# EAGLE board OpenDeck (EAGLE 6.5.0)
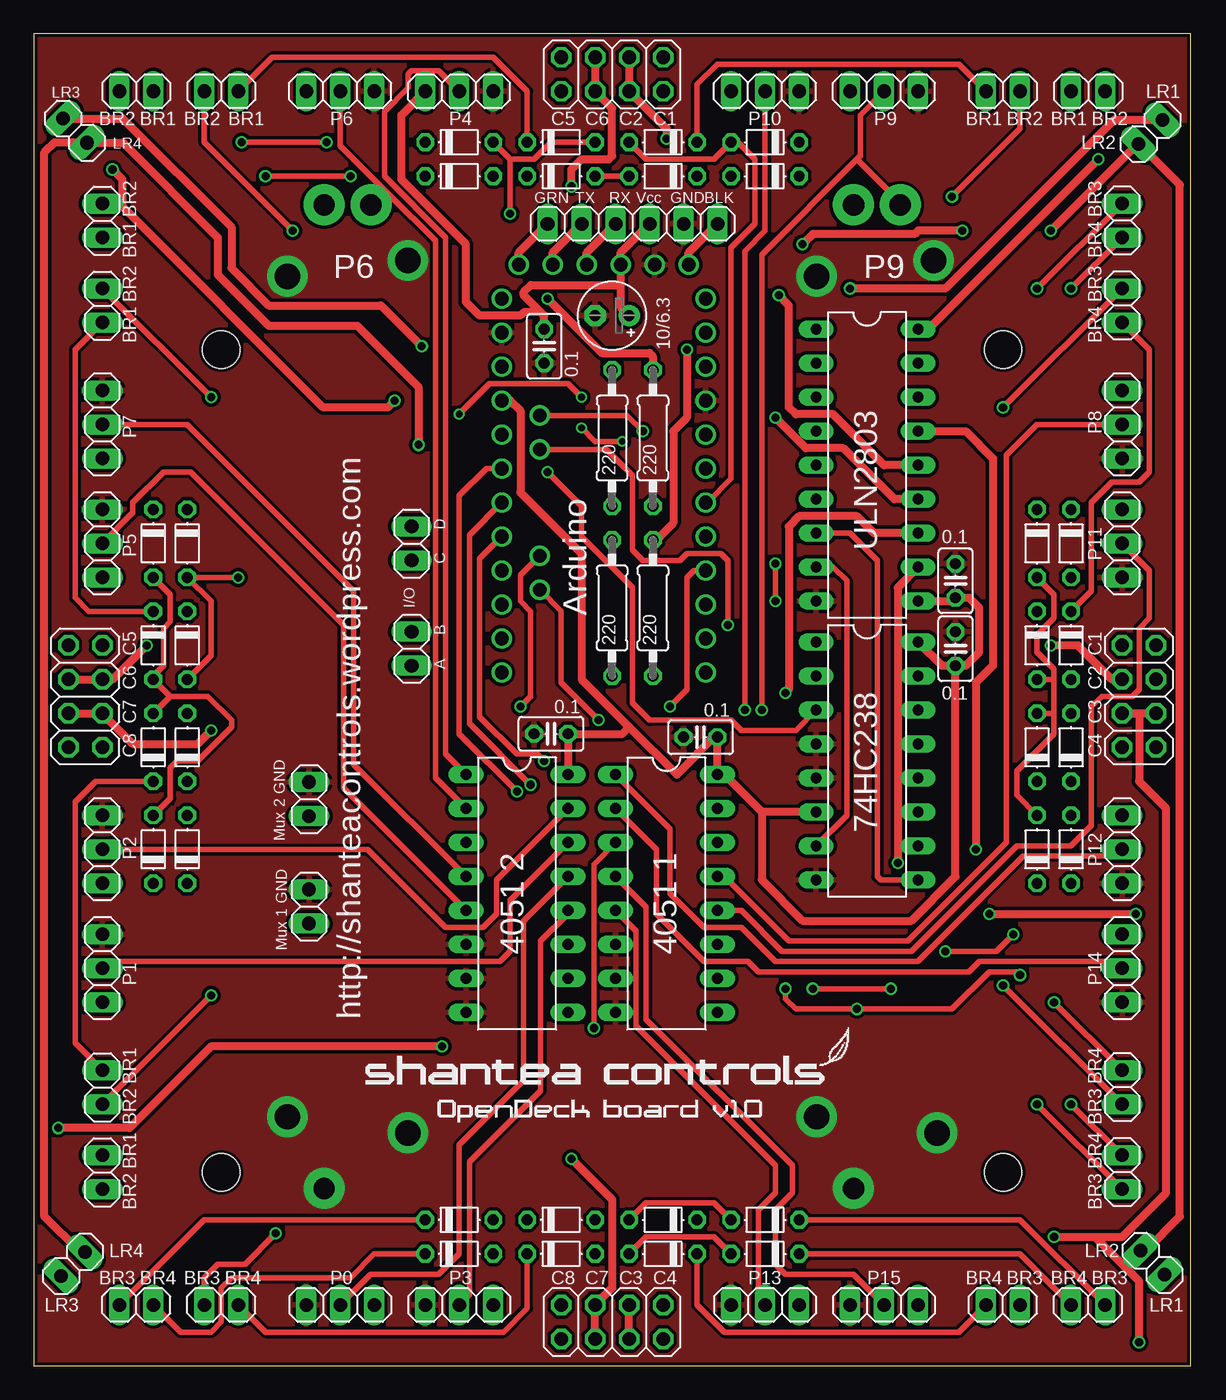
[diagram p0: board, top side]
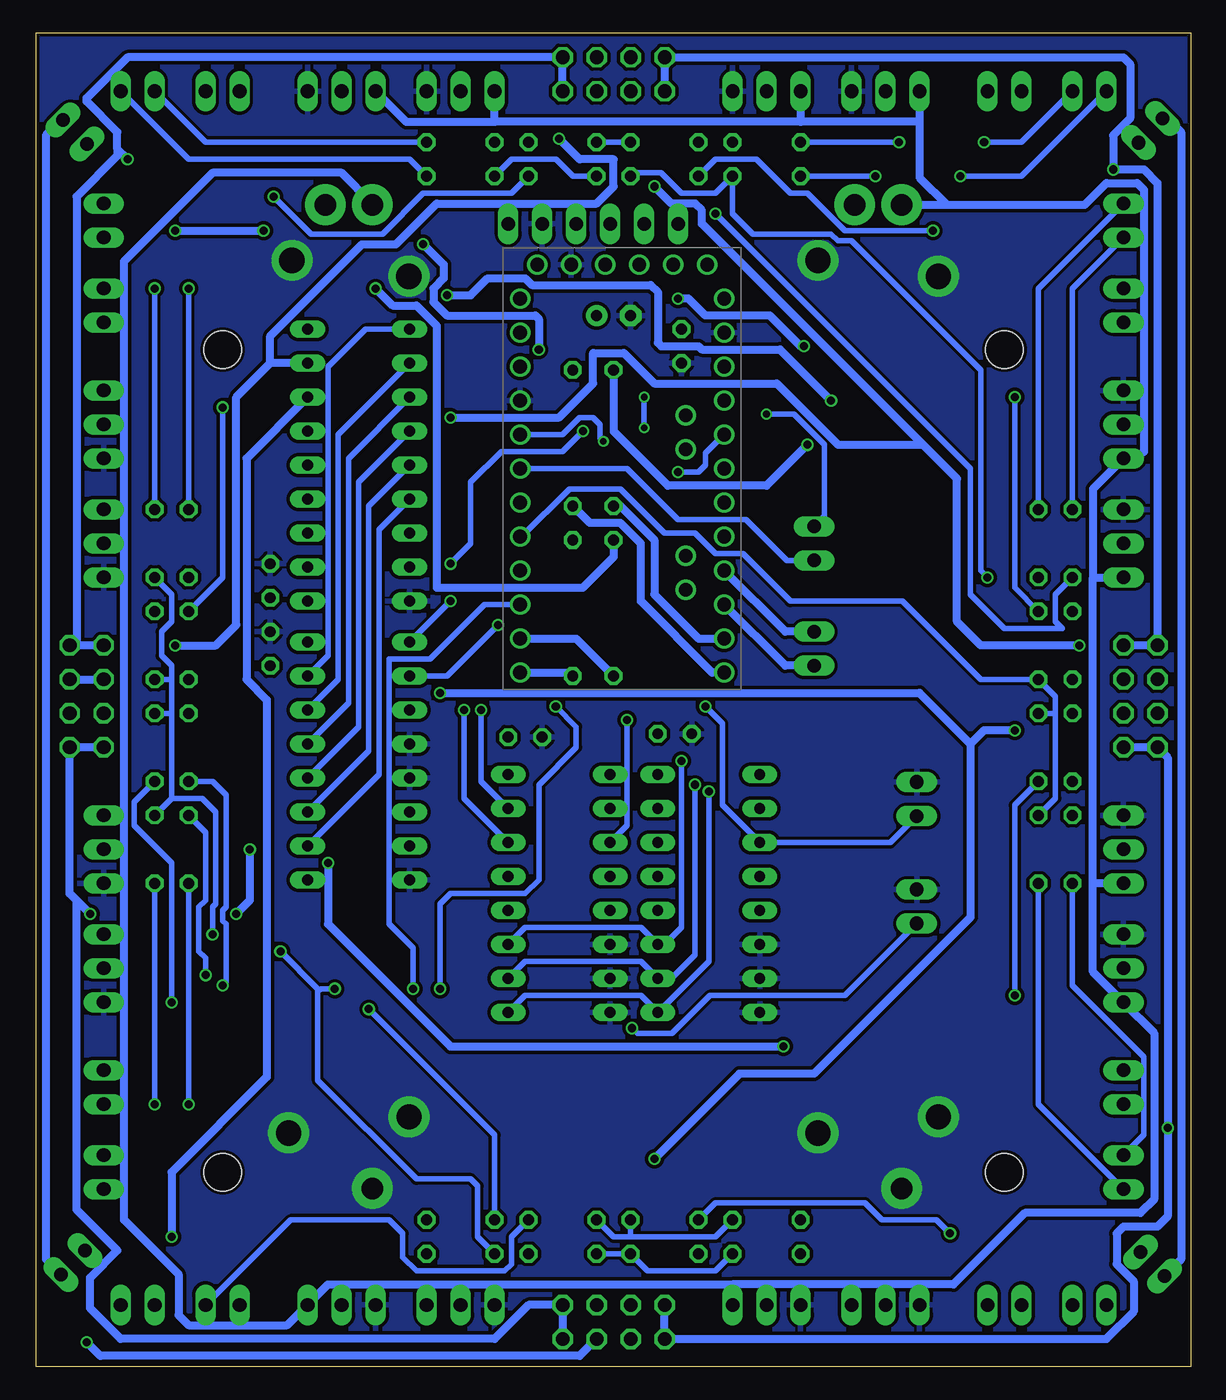
[diagram p1: board, bottom side, seen from below]

Size 86.36 x 99.57 mm. Coordinates in mm from the lower left corner, seen from the top.
Outline: 0,99.57 86.36,99.57 86.36,0 0,0 0,99.57
Copper layers (1*16): Top 0.035mm / dielectric 1.5mm / Bottom 0.035mm
Design rules "ITEADstudio_DRC *": minimum track width 12mil, minimum drill 12mil, track to track 6mil, track to pad 6mil, pad to pad 6mil, via to via 6mil, smd to smd 0mil, copper to edge 10mil, drill to drill 10mil, minimum pad ring 10mil, minimum via ring 6mil, stop-mask expansion 2mil, vias tented up to drill 100mil, thermal gap 10mil
Holes 2.8 mm at 13.97,14.48 72.39,14.48 13.97,75.95 72.39,75.95

## Footprints (pad centres in the part's own frame; a part is rotated, then mirrored left to right if it is on the bottom)
ARDUINO_PRO_MINI = drill 1.016: 1 -7.62,12.7; 2 -7.62,10.16; 3 -7.62,7.62; 4 -7.62,5.08; 5 -7.62,2.54; 6 -7.62,0; 7 -7.62,-2.54; 8 -7.62,-5.08; 9 -7.62,-7.62; 10 -7.62,-10.16; 11 -7.62,-12.7; 12 -7.62,-15.24; 13 7.62,-15.24; 14 7.62,-12.7; 15 7.62,-10.16; 16 7.62,-7.62; 17 7.62,-5.08; 18 7.62,-2.54; 19 7.62,0; 20 7.62,2.54; 21 7.62,5.08; 22 7.62,7.62; 23 7.62,10.16; 24 7.62,12.7; A4 4.763,1.429; A5 4.763,3.969; A6 4.763,-9.049; A7 4.763,-6.509; BLK -6.35,15.24; GND -3.81,15.24; GRN 6.35,15.24; RXI 1.27,15.24; TXO 3.81,15.24; VCC -1.27,15.24
1X02 = drill 1.016 long: 1 -1.27,0; 2 1.27,0
0207/10 = drill 0.813 octagon: 1 -5.08,0; 2 5.08,0
E2,5-5 = drill 0.813 pad 1.6: + -1.27,0 | drill 0.813 pad 1.6 octagon: - 1.27,0
2X04 = drill 1.016 octagon: 1 -3.81,-1.27; 2 -3.81,1.27; 3 -1.27,-1.27; 4 -1.27,1.27; 5 1.27,-1.27; 6 1.27,1.27; 7 3.81,-1.27; 8 3.81,1.27
1X03 = drill 1.016 long: 1 -2.54,0; 2 0,0; 3 2.54,0
D-5 = drill 0.813 octagon: A 2.54,0; C -2.54,0
DIL16 = drill 0.813 long: 1 -8.89,-3.81; 2 -6.35,-3.81; 3 -3.81,-3.81; 4 -1.27,-3.81; 5 1.27,-3.81; 6 3.81,-3.81; 7 6.35,-3.81; 8 8.89,-3.81; 9 8.89,3.81; 10 6.35,3.81; 11 3.81,3.81; 12 1.27,3.81; 13 -1.27,3.81; 14 -3.81,3.81; 15 -6.35,3.81; 16 -8.89,3.81
C025-025X050 = drill 0.813 octagon: 1 -1.27,0; 2 1.27,0
DIL18 = drill 0.813 long: 1 -10.16,-3.81; 2 -7.62,-3.81; 3 -5.08,-3.81; 4 -2.54,-3.81; 5 0,-3.81; 6 2.54,-3.81; 7 5.08,-3.81; 8 7.62,-3.81; 9 10.16,-3.81; 10 10.16,3.81; 11 7.62,3.81; 12 5.08,3.81; 13 2.54,3.81; 14 0,3.81; 15 -2.54,3.81; 16 -5.08,3.81; 17 -7.62,3.81; 18 -10.16,3.81
1X06 = drill 1.016 long: 1 -6.35,0; 2 -3.81,0; 3 -1.27,0; 4 1.27,0; 5 3.81,0; 6 6.35,0

## Placement (x,y rotation side)
E$1  [ARDUINO_PRO_MINI]  42.55,67.06 0 bottom
E$2  [1X02]  13.97,4.57 180 top
E$3  [1X02]  5.08,14.48 90 top
E$4  [0207/10]  46.23,69.34 90 top
E$5  [E2,5-5]  43.18,78.49 180 top
E$6  [2X04]  43.18,3.3 0 top
E$7  [1X02]  5.08,79.25 90 top
E$8  [1X03]  81.28,38.61 270 top
E$9  [2X04]  82.55,50.04 90 top
E$10  [D-5]  11.43,61.47 270 top
E$11  [1X02]  7.62,4.57 180 top
E$12  [D-5]  8.89,61.47 270 top
E$13  [DIL16]  47.24,35.31 270 top
E$14  [1X02]  5.08,20.83 90 top
E$15  [C025-025X050]  49.78,46.99 180 top
E$16  [D-5]  11.43,53.85 270 top
E$17  [D-5]  8.89,53.85 270 top
E$18  [1X02]  83.57,7.73 135 top
E$19  [D-5]  11.43,46.23 90 top
E$20  [2X04]  43.18,96.52 0 top
E$21  [D-5]  8.89,46.23 90 top
E$22  [1X02]  2.9,7.62 225 top
E$23  [D-5]  11.43,38.61 90 top
E$24  [D-5]  8.89,38.61 90 top
E$25  [D-5]  77.47,61.47 270 top
E$26  [D-5]  77.47,53.85 270 top
E$27  [D-5]  74.93,53.85 270 top
E$28  [D-5]  31.75,10.92 0 top
E$29  [D-5]  31.75,8.38 0 top
E$30  [D-5]  39.37,10.92 0 top
E$31  [D-5]  39.37,8.38 0 top
E$32  [0207/10]  46.23,56.64 90 top
E$33  [0207/10]  43.18,56.64 90 top
E$34  [D-5]  46.99,10.92 180 top
E$35  [1X02]  5.08,85.6 90 top
E$36  [D-5]  46.99,8.38 180 top
E$37  [D-5]  77.47,46.23 90 top
E$38  [D-5]  74.93,46.23 90 top
E$39  [D-5]  74.93,38.61 90 top
E$40  [D-5]  77.47,38.61 90 top
E$41  [1X02]  3.05,92.31 135 top
E$42  [1X02]  28.19,61.47 90 top
E$43  [1X02]  28.19,53.59 90 top
E$44  [D-5]  54.61,10.92 180 top
E$45  [D-5]  54.61,8.38 180 top
E$46  [1X02]  78.74,4.57 180 top
E$47  [1X02]  72.39,4.57 180 top
E$48  [1X03]  22.86,4.57 0 top
E$49  [DIL16]  36.07,35.31 270 top
E$50  [C025-025X050]  38.61,47.24 180 top
E$51  [1X03]  5.08,70.36 270 top
E$52  [1X03]  5.08,61.47 270 top
E$53  [1X03]  5.08,38.61 270 top
E$54  [1X03]  5.08,29.72 270 top
E$59  [1X03]  31.75,4.57 0 top
E$60  [1X03]  54.61,4.57 0 top
E$61  [1X03]  63.5,4.57 0 top
E$62  [1X02]  72.39,95.25 0 top
E$63  [2X04]  3.81,50.04 90 top
E$64  [1X02]  78.74,95.25 0 top
E$65  [D-5]  54.61,88.9 180 top
E$66  [D-5]  54.61,91.44 180 top
E$67  [D-5]  46.99,88.9 180 top
E$68  [D-5]  46.99,91.44 180 top
E$69  [D-5]  39.37,88.9 0 top
E$70  [D-5]  39.37,91.44 0 top
E$71  [D-5]  31.75,88.9 0 top
E$72  [D-5]  31.75,91.44 0 top
E$73  [1X02]  7.62,95.25 0 top
E$74  [1X02]  13.97,95.25 0 top
E$75  [1X03]  63.5,95.25 180 top
E$76  [1X03]  54.61,95.25 180 top
E$77  [1X03]  31.75,95.25 180 top
E$78  [1X03]  22.86,95.25 180 top
E$80  [DIL18]  62.23,67.31 270 top
E$81  [0207/10]  43.18,69.34 90 top
E$82  [1X02]  83.42,92.2 225 top
E$83  [1X06]  44.7,85.34 0 top
E$84  [DIL16]  62.23,45.21 270 top
E$85  [C025-025X050]  68.83,58.67 270 top
E$86  [C025-025X050]  68.83,53.59 270 top
E$87  [1X02]  20.52,34.34 90 top
E$88  [1X02]  20.52,42.37 90 top
E$89  [C025-025X050]  38.1,76.2 270 top
E$92  [D-5]  74.93,61.47 270 top
E$94  [1X02]  81.28,20.83 270 top
E$95  [1X02]  81.28,14.48 270 top
E$96  [1X02]  81.28,85.6 270 top
E$97  [1X02]  81.28,79.25 270 top
E$98  [1X03]  81.28,29.72 270 top
E$100  [1X03]  81.28,61.47 270 top
E$101  [1X03]  81.28,70.36 270 top

## Library data of the parts
E$1 = SparkFun-Boards
E$2 E$3 E$6-E$9 E$11 E$14 E$18 E$20 E$22 E$35 E$41-E$43 E$46-E$48 E$51-E$54 E$59-E$64 E$73-E$78 E$82 E$83 E$87 E$88 E$94-E$98 E$100 E$101 = pinhead
E$4 E$5 E$15 E$32 E$33 E$50 E$81 E$85 E$86 E$89 = rcl
E$10 E$12 E$16 E$17 E$19 E$21 E$23-E$31 E$34 E$36-E$40 E$44 E$45 E$65-E$72 E$92 = diode
E$13 E$49 E$80 E$84 = 40xx

## Nets
B_ROW_1: E$1.7 E$12.A E$17.A E$21.A E$24.A E$66.A E$68.A E$70.A E$72.A
B_ROW_2: E$1.8 E$10.A E$16.A E$19.A E$23.A E$65.A E$67.A E$69.A E$71.A
B_ROW_3: E$1.9 E$27.A E$28.A E$30.A E$34.A E$38.A E$39.A E$44.A E$92.A
B_ROW_4: E$1.10 E$25.A E$26.A E$29.A E$31.A E$36.A E$37.A E$40.A E$45.A
COLUMN_1: E$9.7 E$9.8 E$20.7 E$20.8 E$80.18
COLUMN_2: E$9.5 E$9.6 E$20.5 E$20.6 E$80.17
COLUMN_3: E$6.5 E$6.6 E$9.3 E$9.4 E$80.16
COLUMN_4: E$6.7 E$6.8 E$9.1 E$9.2 E$80.15
COLUMN_5: E$20.1 E$20.2 E$63.7 E$63.8 E$80.14
COLUMN_6: E$20.3 E$20.4 E$63.5 E$63.6 E$80.13
COLUMN_7: E$6.3 E$6.4 E$63.3 E$63.4 E$80.12
COLUMN_8: E$6.1 E$6.2 E$63.1 E$63.2 E$80.11
DEC_0: E$1.A5 E$84.1
DEC_1: E$1.A4 E$84.2
DEC_2: E$1.20 E$84.3
DEC_OUT_0: E$80.1 E$84.15
DEC_OUT_1: E$80.2 E$84.14
DEC_OUT_2: E$80.3 E$84.13
DEC_OUT_3: E$80.4 E$84.12
DEC_OUT_4: E$80.5 E$84.11
DEC_OUT_5: E$80.6 E$84.10
DEC_OUT_6: E$80.7 E$84.9
DEC_OUT_7: E$80.8 E$84.7
GND: E$1.4 E$1.23 E$1.GND E$5.- E$8.3 E$13.6 E$13.7 E$13.8 E$15.2 E$48.1 E$49.6 E$49.7 E$49.8 E$50.2 E$51.1 E$52.1 E$53.1 E$54.1 E$59.1 E$60.1 E$61.1 E$75.1 E$76.1 E$77.1 E$78.1 E$80.9 E$83.5 E$84.4 E$84.5 E$84.8 E$85.1 E$86.1 E$87.2 E$88.2 E$89.2 E$98.3 E$100.3 E$101.3
LED_ROW_1: E$18.1 E$33.2 E$82.1
LED_ROW_2: E$18.2 E$32.2 E$82.2
LED_ROW_3: E$4.2 E$22.2 E$41.2
LED_ROW_4: E$22.1 E$41.1 E$81.2
MUX_1_OUT: E$1.A7 E$49.3 E$88.1
MUX_2_OUT: E$1.A6 E$13.3 E$87.1
P0A: E$48.2 E$49.13
P1: E$13.13 E$101.2
P1A: E$49.14 E$54.2
P2: E$13.14 E$75.2
P2A: E$49.15 E$53.2
P3: E$13.15 E$76.2
P3A: E$49.12 E$59.2
P4: E$13.12 E$100.2
P4A: E$49.1 E$77.2
P5: E$8.2 E$13.1
P5A: E$49.5 E$52.2
P6: E$13.5 E$60.2
P6A: E$49.2 E$78.2
P7: E$13.2 E$98.2
P7A: E$49.4 E$51.2
P8: E$13.4 E$61.2
S0: E$1.17 E$13.11 E$49.11
S1: E$1.18 E$13.10 E$49.10
S2: E$1.19 E$13.9 E$49.9
S$1: E$1.15 E$43.1
S$2: E$1.16 E$43.2
S$3: E$1.5 E$42.2
S$4: E$1.6 E$42.1
S$6: E$39.C E$95.2
S$7: E$25.C E$96.2
S$10: E$38.C E$94.2
S$11: E$1.11 E$33.1
S$12: E$26.C E$97.2
S$14: E$1.12 E$32.1
S$16: E$1.13 E$4.1
S$19: E$1.14 E$81.1
S$22: E$1.GRN E$83.1
S$23: E$1.TXO E$83.2
S$24: E$1.RXI E$83.3
S$28: E$1.BLK E$83.6
S$52: E$2.1 E$31.C
S$53: E$2.2 E$30.C
S$54: E$11.1 E$29.C
S$55: E$11.2 E$28.C
S$56: E$36.C E$47.2
S$57: E$34.C E$47.1
S$58: E$45.C E$46.2
S$59: E$44.C E$46.1
S$60: E$12.C E$35.1
S$61: E$10.C E$35.2
S$62: E$3.2 E$24.C
S$63: E$3.1 E$23.C
S$64: E$14.2 E$21.C
S$65: E$14.1 E$19.C
S$66: E$7.2 E$16.C
S$67: E$7.1 E$17.C
S$69: E$92.C E$96.1
S$70: E$40.C E$95.1
S$73: E$27.C E$97.1
S$74: E$37.C E$94.1
S$76: E$71.C E$73.1
S$77: E$72.C E$73.2
S$78: E$64.2 E$65.C
S$79: E$64.1 E$66.C
S$80: E$70.C E$74.2
S$81: E$69.C E$74.1
S$82: E$62.1 E$68.C
S$83: E$62.2 E$67.C
VCCA: E$1.VCC E$5.+ E$8.1 E$48.3 E$51.3 E$52.3 E$53.3 E$54.3 E$59.3 E$60.3 E$61.3 E$75.3 E$76.3 E$77.3 E$78.3 E$83.4 E$89.1 E$98.1 E$100.1 E$101.1
VCCD: E$1.21 E$13.16 E$15.1 E$49.16 E$50.1 E$80.10 E$84.6 E$84.16 E$85.2 E$86.2

## Tracks (layer width: path | path; a pad name or v marks a point on that pad's centre or on a via)
B_ROW_1  (via drill 0.6)
  Top 0.406: E$12.A 10.16,57.66 10.16,55.63 9.65,55.12 9.65,52.32 8.89,51.56 E$17.A 10.16,50.04 | E$21.A 10.16,50.04 | E$24.A 10.16,42.42 10.16,44.7 10.67,45.21 12.19,45.21 14.73,47.75 14.73,48.26 12.95,50.04 10.16,50.04 | 35.56,90.17 37.34,90.17 38.61,91.44 E$70.A | E$68.A 45.72,90.17 50.8,90.17 E$66.A 52.58,91.44 53.85,90.17 53.85,85.34 52.07,83.57 52.07,66.29 50.29,64.52 E$1.7 | v35.56,86.11 35.56,90.17 | 35.56,90.17 E$72.A
  Bottom 0.406: E$70.A E$68.A | v35.56,86.11 16.51,67.06 16.51,57.66 13.97,55.12 9.65,55.12 10.16,55.63 10.16,57.66 E$12.A
B_ROW_2  (via drill 0.6)
  Top 0.406: E$69.A E$67.A | E$16.A 13.21,53.09 13.21,57.15 E$10.A v15.24,58.93
  Bottom 0.406: E$69.A 41.66,89.15 39.62,89.15 38.1,87.63 35.56,87.63 E$71.A 34.29,86.11 32.77,84.58 26.92,84.58 26.42,84.07 25.4,84.07 15.75,74.42 15.75,59.44 v15.24,58.93 | E$65.A 50.8,90.17 47.5,90.17 46.23,88.9 E$67.A | E$23.A 10.16,42.42 10.16,48.77 | 10.16,48.77 10.16,50.04 E$16.A 15.75,51.31 21.59,57.15 29.97,57.15 33.53,60.71 35.56,60.71 37.08,62.23 39.37,62.23 42.67,65.53 46.48,65.53 50.04,61.98 E$1.8 | E$19.A 10.16,48.77
B_ROW_3  (via drill 0.6)
  Top 0.406: v73.66,29.21 73.41,29.46 71.37,29.46 68.58,26.67 v61.47,26.67 56.9,26.67 56.13,27.43 v56.13,28.19 | E$1.9 49.28,59.44 48.77,58.93 48.77,50.55 v47.5,49.28 | E$34.A 45.72,12.19 50.8,12.19 E$44.A | E$92.A 76.2,57.66 76.2,55.88 74.93,54.61 74.93,53.34 76.2,52.07 76.2,51.31 | E$27.A 76.2,51.31 | 76.2,48.77 76.2,51.31 | E$38.A 76.2,48.77 | 76.2,48.77 76.2,47.24 73.41,44.45 73.41,42.67 E$39.A
  Bottom 0.406: E$44.A 52.07,17.27 v61.47,26.67 | v73.66,29.21 73.66,30.48 74.17,30.99 74.17,34.29 73.66,34.8 73.66,39.88 E$39.A | v56.13,28.19 56.13,34.54 55.37,35.31 49.78,35.31 48.77,36.32 48.77,43.43 45.97,46.23 45.97,47.75 v47.5,49.28 | E$34.A 43.18,9.65 41.91,9.65 | E$30.A 41.91,9.65 | 41.91,9.65 35.56,9.65 E$28.A
B_ROW_4  (via drill 0.6)
  Top 0.406: E$45.A 50.8,9.65 45.72,9.65 E$36.A | v68.07,30.99 71.88,30.99 v73.15,32.26 | v58.17,28.19 v64.01,28.19
  Bottom 0.406: 76.2,51.31 76.2,52.32 76.96,53.09 76.96,54.86 76.2,55.63 76.2,57.66 E$25.A | 76.2,51.31 E$26.A | E$37.A 76.2,48.77 | 76.2,48.77 76.2,51.31 | E$40.A 76.2,42.42 | 76.2,42.42 76.2,48.77 | E$45.A 53.34,9.65 53.34,13.46 53.85,13.97 57.91,13.97 65.28,21.34 65.28,27.94 | 65.28,27.94 65.28,28.19 v68.07,30.99 | v73.15,32.26 73.15,34.29 72.9,34.54 72.9,41.4 73.91,42.42 76.2,42.42 | E$1.10 52.83,56.9 56.9,52.83 59.94,52.83 59.94,33.02 58.17,31.24 v58.17,28.19 | v64.01,28.19 65.02,28.19 65.28,27.94 | E$36.A E$31.A 40.64,7.11 35.56,7.11 E$29.A
COLUMN_1  (via drill 0.6)
  Top 0.61: E$80.18 66.8,77.47 v79.5,90.17
  Bottom 0.61: v79.5,90.17 80.26,90.93 | 80.26,90.93 80.26,92.2 82.55,94.49 82.55,94.74 79.5,97.79 E$20.8 E$20.7 | E$9.7 E$9.8 83.31,53.85 83.31,87.38 80.26,90.42 80.26,90.93
COLUMN_2  (via drill 0.6)
  Top 0.61: v75.95,53.85 77.98,53.85 80.52,51.31 E$9.6 | v47.24,91.69 47.24,92.46 E$20.5 E$20.6
  Bottom 0.61: v75.95,53.85 72.9,53.85 71.37,55.37 71.37,72.39 68.83,74.93 | 68.83,74.93 68.83,76.96 61.98,83.82 59.44,83.82 56.39,86.87 44.45,86.87 43.18,88.14 43.18,90.17 45.72,90.17 v47.24,91.69 | E$80.17 68.83,74.93 | E$9.5 E$9.6
COLUMN_3  (via drill 0.6)
  Top 0.61: v76.2,9.65 79.25,9.65 | 79.25,9.65 81.28,9.65 84.58,12.95 84.58,41.66 82.55,43.69 82.55,48.77 E$9.4 E$9.3 | E$6.5 E$6.6 | v82.55,1.78 82.55,6.35 79.25,9.65
  Bottom 0.61: E$80.16 70.61,67.82 70.61,51.31 69.09,49.78 69.09,21.59 76.2,14.48 v76.2,9.65 | E$6.5 45.72,0.76 81.53,0.76 v82.55,1.78
COLUMN_4  (via drill 0.6)
  Top 0.61: E$80.15 69.6,69.85 71.63,67.82 71.63,52.32 70.36,51.05 v70.36,38.61 | v71.37,33.78 v82.3,33.78
  Bottom 0.406: 83.57,46.23 E$9.1
  Bottom 0.61: 83.31,34.8 83.31,11.68 80.26,8.64 82.3,6.6 82.3,4.32 80.01,2.03 52.07,2.03 49.53,4.57 E$6.8 E$6.7 | 83.31,34.8 83.82,35.31 E$9.1 E$9.2 | v70.36,38.61 70.36,34.8 v71.37,33.78 | v82.3,33.78 83.31,34.8
COLUMN_5  (via drill 0.6)
  Top 0.61: v55.63,80.01 56.39,79.25 56.39,71.63 56.9,71.12 59.69,71.12 63.5,67.31 E$80.14 | v26.92,72.14 26.42,71.63 21.59,71.63 6.6,86.61 6.6,88.65 v5.84,89.41
  Bottom 0.61: v55.63,80.01 53.85,80.01 52.58,81.28 49.78,81.28 49.28,80.77 40.39,80.77 39.88,80.26 39.88,76.45 39.62,76.2 36.83,76.2 36.58,75.95 30.73,75.95 v26.92,72.14 | E$63.7 E$63.8 2.54,88.39 3.56,89.41 v5.84,89.41 5.84,91.95 4.57,93.22 4.57,97.28 5.08,97.79 E$20.2 E$20.1
COLUMN_6  (via drill 0.6)
  Top 0.61: v8.38,53.85 5.84,51.31 E$63.5 E$63.6 | v40.13,88.14 40.13,89.41 40.89,90.17 42.93,90.17 43.18,90.42 43.18,93.98 E$20.3 E$20.4 | E$80.13 64.26,64.77 60.45,68.58 57.66,68.58 v55.37,70.87
  Bottom 0.61: v8.38,53.85 15.75,53.85 17.53,55.63 17.53,66.29 20.07,68.83 | 20.07,68.83 36.58,85.34 36.58,86.36 37.08,86.87 38.86,86.87 v40.13,88.14 | v55.37,70.87 47.24,70.87 44.7,73.41 44.7,75.69 42.42,75.69 40.13,73.41 30.99,73.41 26.42,68.83 20.07,68.83
COLUMN_7  (via drill 0.6)
  Top 0.61: v13.21,47.5 12.19,46.48 7.37,46.48 E$63.3 E$63.4 | v40.13,15.49 43.18,12.45 43.18,5.84 E$6.4 E$6.3 | E$80.12 62.74,62.23 61.47,63.5 57.15,63.5 56.39,62.74 56.39,50.55 v56.13,50.29
  Bottom 0.61: v13.21,47.5 15.49,47.5 16.51,46.48 | 16.51,46.48 16.51,33.53 28.19,21.84 33.78,21.84 v40.13,15.49 | v56.13,50.29 20.32,50.29 16.51,46.48
COLUMN_8  (via drill 0.6)
  Top 0.61: E$80.11 64.52,58.17 v64.52,37.59 | v30.48,23.88 13.21,23.88 7.11,17.78 v1.78,17.78
  Bottom 0.61: v64.52,37.59 64.52,33.02 55.37,23.88 v30.48,23.88 | E$6.2 E$6.1 6.35,2.03 4.32,4.06 4.32,6.35 5.59,7.62 5.59,9.91 5.08,10.41 2.54,10.41 1.78,11.18 v1.78,17.78 1.78,45.47 E$63.2 E$63.1
DEC_0  (via drill 0.6)
  Top 0.406: E$1.A5 44.29,71.03 v45.47,69.85 | v55.37,59.94 v55.37,57.15
  Bottom 0.406: v45.47,69.85 46.99,68.33 51.56,68.33 53.85,66.04 53.85,61.47 v55.37,59.94 | v55.37,57.15 E$84.1
DEC_1  (via drill 0.6)
  Top 0.406: v51.82,55.37 51.82,60.2 51.31,60.71 48.77,60.71 48.26,60.2 45.47,60.2 44.7,60.96 44.7,66.55 42.77,68.48 E$1.A4
  Bottom 0.406: v51.82,55.37 55.63,51.56 E$84.2
DEC_2  (via drill 0.6)
  Top 0.406: E$84.3 56.9,47.5 52.83,47.5 52.07,48.26 45.97,48.26 44.7,49.53 44.7,58.17 40.89,61.98 40.89,64.26 v38.35,66.8
  Bottom 0.406: v38.35,66.8 36.83,66.8 36.32,67.31 36.32,68.2 E$1.20
DEC_OUT_0
  Bottom 0.406: E$80.1 61.72,77.47 64.52,74.68 64.52,53.09 E$84.15
DEC_OUT_1
  Bottom 0.406: E$84.14 63.75,51.31 63.75,69.6 E$80.2
DEC_OUT_2
  Bottom 0.406: E$80.3 62.99,67.82 62.99,49.53 E$84.13
DEC_OUT_3
  Bottom 0.406: E$84.12 62.23,47.75 62.23,66.04 E$80.4
DEC_OUT_4
  Bottom 0.406: E$80.5 61.47,64.26 61.47,45.97 E$84.11
DEC_OUT_5
  Bottom 0.406: E$84.10 60.71,44.2 60.71,62.48 E$80.6
DEC_OUT_6
  Top 0.406: E$80.7 60.96,62.23 62.99,60.2 62.99,36.58 63.25,36.32 E$84.9
DEC_OUT_7
  Top 0.406: E$80.8 59.69,59.69 60.71,58.67 60.71,41.15 E$84.7
GND  (via drill 1.6 pad 3.05, 1.9 pad 3.05)
  other vias: 67.46,17.42 61.21,13.27 58.46,18.62 18.91,18.62 27.91,17.42 21.66,13.27 67.21,82.62 58.46,81.42 27.91,82.62 18.91,81.42
  pour Bottom (isolate 0.254): -0.25,99.82 86.61,99.82 86.61,-0.25 -0.25,-0.25
  pour Top (isolate 0.254): -0.25,-0.25 86.61,-0.25 86.61,99.82 -0.25,99.82
LED_ROW_1  (via drill 0.6)
  Top 0.61: v60.96,80.52 68.07,80.52 80.65,93.1 E$82.1
  Bottom 0.61: E$82.1 84.45,93.1 85.6,91.95 85.6,8 84.42,6.83 E$18.1 | v60.96,80.52 59.69,79.25 57.91,79.25 56.39,77.72 56.39,58.17 45.47,58.17 43.18,60.45 E$33.2
LED_ROW_2  (via drill 0.6)
  Top 0.61: v69.34,84.84 66.04,84.84 65.79,84.58 58.17,84.58 v57.4,83.82 | v48.77,75.95 48.77,70.87 47.75,69.85 47.75,62.99 46.48,61.72 E$32.2 | v75.95,84.84 82.41,91.3 E$82.2 82.56,91.3 85.6,88.27 85.6,11.18 83.05,8.62 E$18.2
  Bottom 0.61: v75.95,84.84 v69.34,84.84 | v57.4,83.82 55.88,82.3 55.88,81.28 56.64,80.52 56.64,79.5 55.63,78.49 49.02,78.49 48.77,78.23 v48.77,75.95
LED_ROW_3  (via drill 0.6)
  Top 0.61: E$4.2 46.23,75.44 45.97,75.69 42.42,75.69 v38.35,79.76 | v28.96,76.2 25.91,79.25 17.53,79.25 14.73,82.04 14.73,85.09 6.62,93.21 E$41.2
  Bottom 0.406: v28.96,76.2 29.21,76.2
  Bottom 0.61: E$41.2 1.77,93.21 0.76,92.2 0.76,7.96 E$22.2 | v38.35,79.76 37.59,79.76 36.32,78.49 31.5,78.49 29.21,76.2 | E$22.2
LED_ROW_4  (via drill 0.6)
  Top 0.61: v28.7,68.83 28.7,73.15 24.13,77.72 17.53,77.72 13.72,81.53 13.72,84.33 6.63,91.41 E$41.1 1.49,91.41 0.76,90.68 0.76,11.18 3.42,8.52 E$22.1
  Bottom 0.61: E$81.2 43.18,69.85 39.12,65.79 31.75,65.79 v28.7,68.83
MUX_1_OUT  (via drill 0.6)
  Top 0.406: v36.32,49.28 37.08,50.04 37.08,56.39 36.32,57.15 36.32,59.09 E$1.A7
  Bottom 0.406: v36.32,49.28 35.05,48.01 35.05,41.91 E$49.3 22.5,39.12 E$88.1
MUX_2_OUT  (via drill 0.6)
  Top 0.406: v42.16,48.26 39.37,51.05 39.37,56.42 E$1.A6 | v41.81,25.25 41.81,37.49 E$13.3
  Bottom 0.406: E$13.3 42.16,40.39 v42.16,48.26 | E$87.1 25.91,27.69 35.97,27.69 38.81,24.84 41.4,24.84 v41.81,25.25
P0A
  Top 0.406: E$48.2 25.15,6.86 30.23,6.86 31.75,8.38 31.75,16.51 36.58,21.34 36.58,33.27 E$49.13
P1
  Top 0.406: E$13.13 51.56,36.58 56.39,31.75 65.28,31.75 72.64,39.12 72.64,68.07 74.93,70.36 E$101.2
P1A
  Top 0.406: E$54.2 5.59,30.23 34.8,30.23 35.56,30.99 35.56,34.8 E$49.14
P2  (via drill 0.6, 1.6 pad 3.05)
  Top 0.406: v54.36,49.02 54.36,83.06 61.47,90.17 | E$75.2 61.72,93.47 61.72,90.42 61.47,90.17 | v64.71,86.77 64.71,86.93 61.47,90.17
  Bottom 0.406: E$13.14 54.36,42.42 v54.36,49.02
P2A
  Top 0.406: E$53.2 24.89,38.61 30.73,32.77 33.53,32.77 34.54,33.78 34.54,36.32 E$49.15
P3  (via drill 0.6)
  Top 0.406: E$76.2 54.61,84.84 53.09,83.31 v53.09,49.02
  Bottom 0.406: v53.09,49.02 53.09,43.69 E$13.15
P3A
  Top 0.406: E$49.12 39.88,33.78 37.85,31.75 37.85,20.57 32.51,15.24 32.51,5.33 E$59.2
P4
  Top 0.406: E$13.12 52.83,34.04 55.88,30.99 65.53,30.99 73.41,38.86 77.47,38.86 78.99,40.39 78.99,49.28 79.76,50.04 82.04,50.04 82.55,50.55 82.55,55.12 83.31,55.88 83.31,59.44 E$100.2
P4A
  Top 0.406: E$77.2 30.23,96.77 28.19,96.77 27.94,96.52 27.94,95.5 26.16,93.73 26.16,88.9 30.73,84.33 30.73,45.72 E$49.1
P5
  Top 0.406: E$13.1 47.5,40.13 47.5,35.31 50.04,32.77 52.83,32.77 55.37,30.23 66.04,30.23 73.91,38.1 80.77,38.1 E$8.2
P5A
  Top 0.406: E$49.5 23.11,43.18 23.11,55.37 11.68,66.8 9.65,66.8 7.37,64.52 7.37,63.75 E$52.2
P6
  Top 0.406: E$60.2 54.1,5.08 54.1,11.68 55.37,12.95 55.37,14.99 44.96,25.4 44.96,32.51 E$13.5
P6A  (via drill 1.6 pad 3.05)
  Top 0.406: E$78.2 22.86,91.19 26.54,87.5 | 26.54,87.5 29.97,84.07 29.97,43.94 E$49.2 | v25.16,86.77 25.81,86.77 26.54,87.5
P7
  Top 0.406: E$13.2 46.48,38.61 46.48,33.78 50.04,30.23 53.34,30.23 54.1,29.46 69.85,29.46 70.61,30.23 80.77,30.23 E$98.2
P7A
  Top 0.406: E$51.2 11.43,70.36 23.88,57.91 23.88,44.96 E$49.4
P8
  Top 0.406: E$13.4 45.72,34.29 45.72,25.91 56.64,14.99 56.64,12.95 55.37,11.68 55.37,7.62 56.13,6.86 61.21,6.86 E$61.2
S0  (via drill 0.6)
  Top 0.406: v38.1,45.21 37.59,45.72 36.07,45.72 33.27,48.51 33.27,60.33 E$1.17
  Bottom 0.406: E$13.11 49.78,32.77 41.15,32.77 E$49.11 39.37,31.5 38.1,32.77 v38.1,45.21
S1  (via drill 0.6)
  Top 0.406: v37.08,43.43 32.51,48.01 32.51,62.1 E$1.18
  Bottom 0.406: E$13.10 49.78,30.23 41.15,30.23 E$49.10 38.86,28.96 37.08,30.73 v37.08,43.43
S2  (via drill 0.6)
  Top 0.406: E$1.19 33.78,67.06 31.75,65.02 31.75,47.24 v36.07,42.93
  Bottom 0.406: E$13.9 49.78,27.69 41.15,27.69 E$49.9 36.07,30.23 v36.07,42.93
S$1
  Bottom 0.61: E$43.1 30.35,52.32 E$1.15
S$2
  Bottom 0.61: E$43.2 30.35,54.86 E$1.16
S$3  (via drill 0.5)
  Top 0.406: v43.94,69.09 41.91,69.09 v40.89,70.1 | v40.89,72.39 39.88,73.41 34.04,73.41 v31.75,71.12
  Bottom 0.406: E$1.5 46.99,69.6 45.72,70.87 44.7,70.87 44.2,70.36 44.2,69.34 v43.94,69.09 | v40.89,70.1 v40.89,72.39 | v31.75,71.12 29.72,71.12 27.43,68.83 27.43,63.5 E$42.2
S$4
  Bottom 0.406: E$42.1 30.23,60.2 33.27,63.25 38.35,63.25 42.16,67.06 E$1.6
S$6  (via drill 0.6)
  Top 0.406: E$95.2 v74.93,19.56
  Bottom 0.406: E$39.C v74.93,19.56
S$7  (via drill 0.6)
  Top 0.406: E$96.2 v77.47,80.52
  Bottom 0.406: E$25.C v77.47,80.52
S$10  (via drill 0.6)
  Top 0.406: E$94.2 v72.39,28.45
  Bottom 0.406: v72.39,28.45 72.14,28.7 72.14,33.02 72.39,33.27 72.39,34.04 72.14,34.29 72.14,42.67 73.15,43.69 E$38.C
S$11
  Bottom 0.61: E$1.11 45.97,54.36 E$33.1
S$12
  Top 0.406: E$26.C 78.99,57.91 78.99,64.52 80.52,66.04 82.55,66.04 83.31,66.8 83.31,75.95 E$97.2
S$14
  Bottom 0.61: E$1.12 46.48,51.82 E$32.1
S$16
  Bottom 0.61: E$1.13 35.81,51.82 41.15,57.15 41.15,61.47 42.67,62.99 44.96,62.99 E$4.1
S$19
  Bottom 0.61: E$81.1 42.67,64.26 40.13,61.72 40.13,57.66 36.83,54.36 E$1.14
S$22
  Top 0.61: E$1.GRN 36.2,83.19 E$83.1
S$23
  Top 0.61: E$1.TXO 38.73,83.19 E$83.2
S$24
  Top 0.61: E$1.RXI 41.27,83.19 E$83.3
S$28
  Top 0.61: E$1.BLK 48.89,83.19 E$83.6
S$52
  Top 0.406: E$2.1 17.27,2.54 35.05,2.54 36.83,4.32 E$31.C
S$53  (via drill 0.6)
  Top 0.406: v18.03,9.91 15.75,7.62 13.72,7.62 12.7,6.6 E$2.2
  Bottom 0.406: E$30.C 35.56,12.19 24.38,12.19 23.11,10.92 19.05,10.92 v18.03,9.91
S$54
  Top 0.406: E$29.C 25.4,8.38 23.62,6.6 14.73,6.6 13.97,5.84 13.97,3.3 13.21,2.54 10.92,2.54 E$11.1
S$55
  Top 0.406: E$28.C 12.7,10.92 E$11.2
S$56
  Top 0.406: E$36.C 49.53,4.57 51.56,2.54 69.09,2.54 E$47.2
S$57
  Bottom 0.406: E$34.C 50.8,9.65 50.8,7.62 51.31,7.11 57.91,7.11 58.93,8.13 58.93,9.91 59.94,10.92 67.31,10.92 E$47.1
S$58
  Top 0.406: E$45.C 73.66,8.38 E$46.2
S$59
  Top 0.406: E$44.C 73.66,10.92 E$46.1
S$60
  Bottom 0.406: E$12.C 8.89,80.52 E$35.1
S$61
  Bottom 0.406: E$10.C 11.43,80.52 E$35.2
S$62
  Bottom 0.406: E$24.C 8.89,28.45 3.56,23.11 3.56,17.27 E$3.2
S$63
  Bottom 0.406: E$23.C 11.43,19.56 E$3.1
S$64
  Top 0.406: E$21.C 4.57,43.69 3.05,42.16 3.05,24.13 E$14.2
S$65  (via drill 0.6)
  Top 0.406: v13.21,27.69 E$14.1
  Bottom 0.406: E$19.C 13.21,41.91 v13.21,27.69
S$66  (via drill 0.6)
  Top 0.406: v13.21,72.39 E$7.2
  Bottom 0.406: E$16.C 13.21,58.17 v13.21,72.39
S$67
  Top 0.406: E$17.C 4.06,56.39 3.05,57.4 3.05,75.95 E$7.1
S$69  (via drill 0.6)
  Top 0.406: E$96.1 v74.93,80.52
  Bottom 0.406: E$92.C v74.93,80.52
S$70  (via drill 0.6)
  Top 0.406: E$95.1 v77.47,19.56
  Bottom 0.406: E$40.C v77.47,19.56
S$73  (via drill 0.6)
  Top 0.406: E$97.1 v72.39,71.63
  Bottom 0.406: v72.39,71.63 72.39,58.93 E$27.C
S$74  (via drill 0.6)
  Top 0.406: E$94.1 v76.2,27.18
  Bottom 0.406: v76.2,27.18 76.2,37.59 78.99,40.39 78.99,42.16 E$37.C
S$76  (via drill 0.6)
  Top 0.406: v23.62,88.9 v17.27,88.9
  Bottom 0.406: E$71.C v23.62,88.9 | v17.27,88.9 12.7,88.9 E$73.1
S$77  (via drill 0.6)
  Top 0.406: v21.84,91.44 v15.49,91.44
  Bottom 0.406: E$72.C v21.84,91.44 | v15.49,91.44 12.7,91.44 E$73.2
S$78
  Bottom 0.406: E$65.C 58.42,90.17 74.93,90.17 E$64.2
S$79
  Bottom 0.406: E$66.C 73.66,91.44 E$64.1
S$80
  Top 0.406: E$70.C 36.83,95.25 34.29,97.79 17.78,97.79 E$74.2
S$81  (via drill 0.6)
  Top 0.406: v19.3,84.84 12.7,91.44 E$74.1
  Bottom 0.406: E$69.C 35.56,90.17 32.51,90.17 29.97,87.63 28.7,87.63 25.91,84.84 v19.3,84.84
S$82
  Top 0.406: E$68.C 49.53,95.76 51.05,97.28 69.09,97.28 E$62.1
S$83  (via drill 0.6)
  Top 0.406: v68.58,87.38 73.66,92.46 E$62.2
  Bottom 0.406: E$67.C 50.8,87.63 57.4,87.63 60.45,84.58 65.79,84.58 v68.58,87.38
VCCA  (via drill 1.6 pad 3.05)
  Top 0.61: E$83.4 43.81,83.19 E$1.VCC 43.81,80.77 | E$5.+ 43.81,79.12 43.81,80.77 | 43.81,80.77 37.08,80.77 36.58,80.26 36.58,80.01 37.85,78.74 | E$89.1 38.1,78.49 37.85,78.74 | 37.85,78.74 36.58,78.74 36.32,78.49 33.27,78.49 32.26,79.5 32.26,83.82 27.43,88.65 27.43,93.47 E$77.3
  Bottom 0.61: v21.66,86.77 18.29,86.77 | 18.29,86.77 7.97,86.77 6.35,88.39 4.06,88.39 3.56,87.88 3.56,68.33 4.06,67.82 E$51.3 7.37,65.53 7.37,58.93 | E$53.3 7.37,36.07 | 7.37,58.93 E$52.3 | 7.37,36.07 7.37,58.93 | 7.37,36.07 7.37,29.46 E$54.3 2.79,24.89 2.79,12.45 3.81,11.43 12.45,11.43 17.78,6.1 25.4,6.1 | E$60.3 57.15,6.1 | 34.29,6.1 E$59.3 | 57.15,6.1 34.29,6.1 | 25.4,6.1 34.29,6.1 | 57.15,6.1 64.52,6.1 E$61.3 67.56,3.05 74.93,3.05 75.69,3.81 75.69,6.86 79.76,10.92 79.76,32.26 | 25.4,6.1 E$48.3 | 79.76,32.26 79.76,41.15 | 79.76,41.15 79.76,64.01 | 79.76,64.01 79.76,72.9 | 79.76,72.9 79.76,82.55 73.15,89.15 63.5,89.15 61.21,86.86 v61.21,86.77 | E$78.3 20.32,92.96 | 20.32,92.96 20.32,88.8 18.29,86.77 | E$75.3 58.67,92.96 52.07,92.96 | 52.07,92.96 E$76.3 | 29.21,92.96 52.07,92.96 | 20.32,92.96 29.21,92.96 | E$77.3 29.21,92.96 | E$101.1 79.76,72.9 | E$100.1 79.76,64.01 | E$98.1 79.76,32.26 | E$8.1 79.76,41.15
VCCD
  Top 0.61: E$80.10 68.58,57.15 E$85.2 69.85,57.4 70.61,56.64 70.61,53.34 69.6,52.32 E$86.2 | E$84.16 67.82,52.32 E$86.2 | E$86.2 68.83,36.58 65.53,33.27 57.4,33.27 54.36,36.32 54.36,41.4 | 54.36,41.4 51.56,44.2 E$13.16 E$15.1 50.8,46.99 48.01,44.2 44.45,47.75 | E$1.21 35.56,72.14 36.32,71.37 36.32,65.28 40.89,60.71 40.89,51.31 44.45,47.75 | 44.45,47.75 43.94,47.24 E$50.1 E$49.16 | E$84.6 54.36,41.4

## Text on the board
tNames: LR3 | LR1 | BR2 | BR1 | BR2 | BR1 | P6 | P4 | C5 | C6 | C2 | C1 | P10 | P9 | BR1 | BR2 | BR1 | BR2 | LR4 | LR2 | GRN | TX | RX | Vcc | GND | BLK | BR2 | BR3 | BR1 | BR4 | P6 | P9 | BR2 | BR3 | BR1 | BR4 | 10/6.3 | 0.1 | P8 | P7 | 220 | 220 | D | 0.1 | P5 | Arduino | ULN2803 | P11 | C | I/O | B | C5 | 220 | 220 | C1 | A | C6 | C2 | 0.1 | 0.1 | 0.1 | C7 | C3 | C8 | C4 | Mux 2 GND | 74HC238 | P2 | P12 | Mux 1 GND | 4051 2 | 4051 1 | P1 | P14 | http://shanteacontrols.wordpress.com | BR1 | BR4 | BR2 | BR3 | BR1 | BR4 | BR2 | BR3 | LR4 | LR2 | BR3 | BR4 | BR3 | BR4 | P0 | P3 | C8 | C7 | C3 | C4 | P13 | P15 | BR4 | BR3 | BR4 | BR3 | LR3 | LR1